# Altium PCB STM32_TFTLCD_ESP8266.PcbDoc
Units mil, origin at the board's own origin, x right, y up, seen from the top; angles counter-clockwise.
Board outline 2930 x 2625 mil, 2 copper layers (Top Layer, Bottom Layer); 20 components, 39 nets, 153 pads, 7 vias.
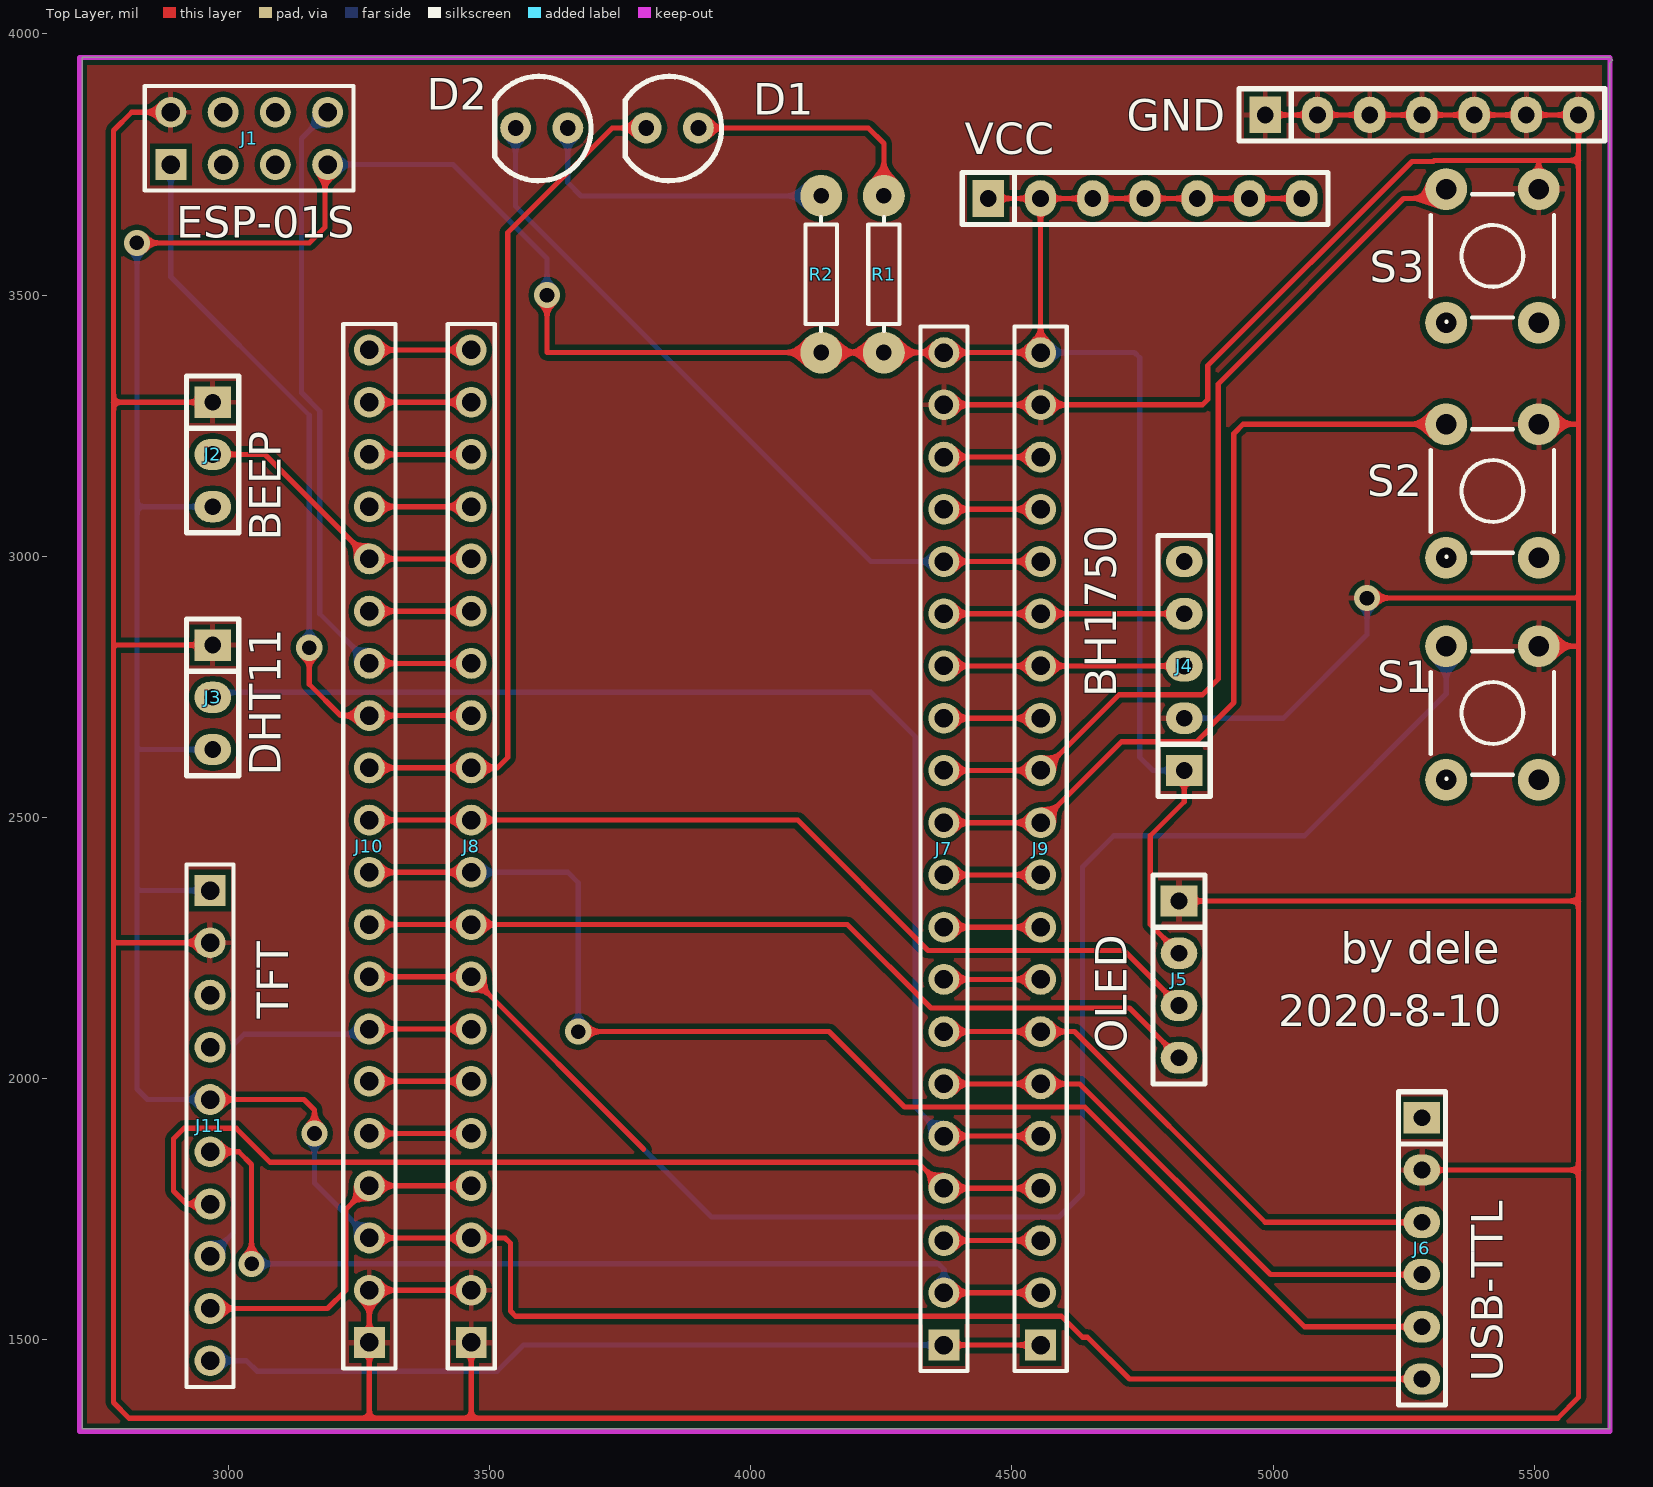
[diagram p0: Top Layer view]
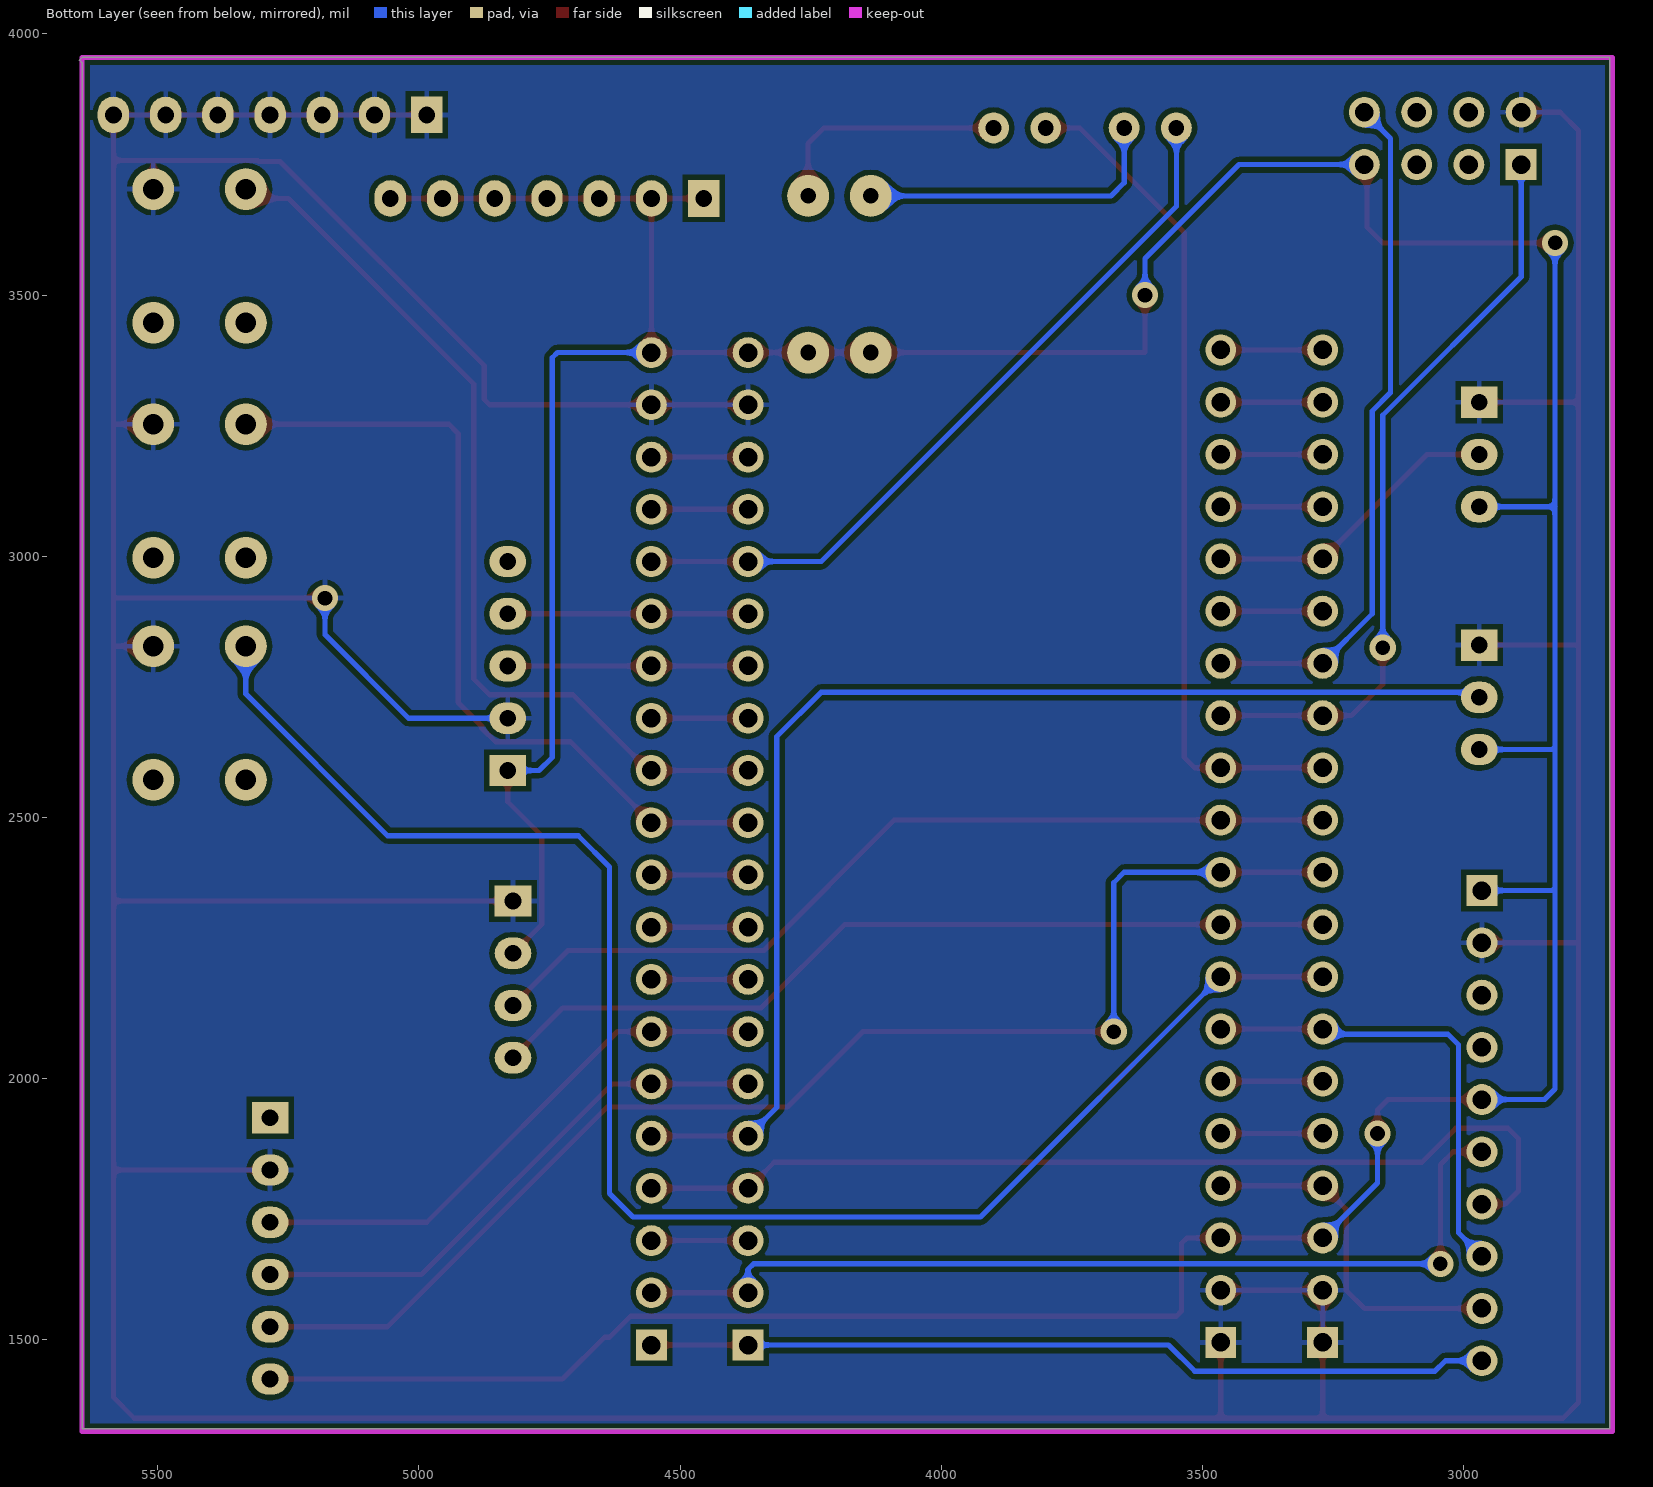
[diagram p1: Bottom Layer view, seen from below]

## Layer stack, top to bottom
Top Solder: solder mask 0.4, Solder Resist, Dk 3.5
Top Layer: signal copper 1.4
Dielectric 1: dielectric 12.6, FR-4, Dk 4.8
Bottom Layer: signal copper 1.4
Bottom Solder: solder mask 0.4, Solder Resist, Dk 3.5

## Board outline
2720,3955 5645,3955 5650,3950 5645,3945 5645,1330 2720,1330 2720,3955

## Design rules (kind name [scope] priority, off if disabled: settings)
Clearance [All] p1: gap=10
PolygonConnect [All] p1: connectstyle=Relief reliefconductorwidth=10 reliefentries=4 polygonreliefangle="90 Angle" airgapwidth=10
RoutingVias [All] p1: holewidth=28 width=50 viastyle="Through Hole" minholewidth=28 minwidth=50 maxholewidth=28 maxwidth=50
SolderMaskExpansion [All] p1: expansion=4
Width [All] p1: maxlimit=10 minlimit=10 preferedwidth=10
30 further rules are at their usual default settings.

## Components (designator, comment, footprint, x,y, rotation, side; value= is the part's Value field where it differs from the comment)
D1 "LED" LED5-BLUE 3900,3820 r180 top
D2 "LED" LED5-BLUE 3650,3820 r180 top
GND "Female HDR1X7" Fe-HDR1X7/2.54-S 4985,3845 r90 top
J1 "ESP8266-01S" Fe-HDR2X4/2.54-S 2890,3750 r0 top
J2 "BEEP" Fe-HDR1X3/2.54-S 2970,3295 r0 top
J3 "DHT11" Fe-HDR1X3/2.54-S 2970,2830 r0 top
J4 "BH1750" Fe-HDR1X5/2.54-S 4830,2590 r180 top
J5 "OLED" Fe-HDR1X4/2.54-S 4820,2340 r0 top
J6 "CP2102 USB-TTL模块" Fe-HDR1X6/2.54-S 5285,1925 r270 top
J7 "STM32" Fe-HDR1X20/2.54-S 4370,1490 r90 top
J8 "STM32" Fe-HDR1X20/2.54-S 3465,1495 r90 top
J9 "" "Pin HDR1X20/2.54mm-S" 4555,1490 r90 top
J10 "" "Pin HDR1X20/2.54mm-S" 3270,1495 r90 top
J11 "ST7735 1.44TFTLCD" Fe-HDR1X10/2.54-S 2965,2360 r0 top
R1 "RES   AXIAL-0.3" "RES   AXIAL-0.3" 4255,3540 r90 top
R2 "RES   AXIAL-0.3" "RES   AXIAL-0.3" 4135,3540 r90 top
S1 "BUT/WD - 6.0×6.0/4/VD" "BUT/WD - 6.0×6.0/4/VD" 5420,2700 r270 top
S2 "BUT/WD - 6.0×6.0/4/VD" "BUT/WD - 6.0×6.0/4/VD" 5420,3125 r270 top
S3 "BUT/WD - 6.0×6.0/4/VD" "BUT/WD - 6.0×6.0/4/VD" 5420,3575 r270 top
VCC "Female HDR1X7" Fe-HDR1X7/2.54-S 4455,3685 r90 top

## Footprints (in the part's own frame and the unit in brackets; to place one, negate y for a bottom-side part, rotate by r counter-clockwise, add the part's x,y. Pads: shape width x height; smd on the part's side, far side on the other; paste and mask are expansions set on the pad)
"BUT/WD - 6.0×6.0/4/VD" [mm] "大小林生 / DaXiaoLinSheng"
  round 2.032 hole 1: 01A(-3.25,2.25) 01B(3.25,2.25) 02A(-3.25,-2.25) 02B(3.25,-2.25)
  silkscreen extent -3,-3 3.2,3
Fe-HDR1X3/2.54-S [mil]
  rect 70x60 hole 32: 1(0,0)
  oval 70x60 hole 32: 2(0,-100) 3(0,-200)
  silkscreen extent -50,-250 50,50, body extent -50,-255 48,55, height 335
Fe-HDR1X4/2.54-S [mil]
  rect 70x60 hole 32: 1(0,0)
  oval 70x60 hole 32: 2(0,-100) 3(0,-200) 4(0,-300)
  silkscreen extent -50,-350 50,50, body extent -44,-355 54,55, height 335
Fe-HDR1X5/2.54-S [mil]
  rect 70x60 hole 32: 1(0,0)
  oval 70x60 hole 32: 2(0,-100) 3(0,-200) 4(0,-300) 5(0,-400)
  silkscreen extent -50,-450 50,50, body extent -50,-455 48,55, height 126
Fe-HDR1X6/2.54-S [mil]
  rect 60x70 hole 32: 1(0,0)
  oval 60x70 hole 32: 2(100,0) 3(200,0) 4(300,0) 5(400,0) 6(500,0)
  silkscreen extent -50,-45 550,45, body extent -55,-49 555,49, height 109
Fe-HDR1X7/2.54-S [mil]
  rect 70x60 hole 32: 1(0,0)
  oval 70x60 hole 32: 2(0,-100) 3(0,-200) 4(0,-300) 5(0,-400) 6(0,-500) 7(0,-600)
  silkscreen extent -50,-650 50,50, body extent -49,-655 49,55, height 126
Fe-HDR1X10/2.54-S [mm]
  rect 1.5x1.5 hole 0.9: 1(0,0)
  round 1.5 hole 0.9: 2(0,-2.54) 3(0,-5.08) 4(0,-7.62) 5(0,-10.16) 6(0,-12.7) 7(0,-15.24) 8(0,-17.78) 9(0,-20.32) 10(0,-22.86)
  silkscreen extent -1.14,-24.13 1.14,1.27, body extent -1.25,-24.26 1.25,1.4, height 3.2
Fe-HDR1X20/2.54-S [mm]
  rect 1.5x1.5 hole 0.9: 1(0,0)
  round 1.5 hole 0.9: 2(2.54,0) 3(5.08,0) 4(7.62,0) 5(10.16,0) 6(12.7,0) 7(15.24,0) 8(17.78,0) 9(20.32,0) 10(22.86,0) 11(25.4,0) 12(27.94,0) 13(30.48,0) 14(33.02,0) 15(35.56,0) 16(38.1,0) 17(40.64,0) 18(43.18,0) 19(45.72,0) 20(48.26,0)
  silkscreen extent -1.27,-1.14 49.53,1.14, body extent -1.4,-1.27 49.65,1.23, height 2.74
Fe-HDR2X4/2.54-S [mm] "Connector; Header; 4x2 Position"
  rect 1.5x1.5 hole 0.9: 1(0,0)
  round 1.5 hole 0.9: 2(0,2.54) 3(2.54,0) 4(2.54,2.54) 5(5.08,0) 6(5.08,2.54) 7(7.62,0) 8(7.62,2.54)
  silkscreen extent -1.27,-1.27 8.89,3.81, body extent -1.27,-1.23 9.14,3.77, height 8.5
LED5-BLUE [mm]
  round 1.5 hole 0.762: A(0,0) K(2.54,0)
  silkscreen extent -1.12,-2.51 3.56,2.57, body extent -1.58,-2.85 3.77,2.85, height 8.6
"Pin HDR1X20/2.54mm-S" [mm]
  rect 1.5x1.5 hole 0.9: 1(0,0)
  round 1.5 hole 0.9: 2(2.54,0) 3(5.08,0) 4(7.62,0) 5(10.16,0) 6(12.7,0) 7(15.24,0) 8(17.78,0) 9(20.32,0) 10(22.86,0) 11(25.4,0) 12(27.94,0) 13(30.48,0) 14(33.02,0) 15(35.56,0) 16(38.1,0) 17(40.64,0) 18(43.18,0) 19(45.72,0) 20(48.26,0)
  silkscreen extent -1.27,-1.27 49.53,1.27, body extent -1.27,-1.27 49.53,1.27, height 7.58
"RES   AXIAL-0.3" [mil] "大小林生 / DaXiaoLinSheng"
  round 80 hole 30: 01(-150,0) 02(150,0)
  silkscreen extent -109,-30 109,30

## Part data
J1: library part "Female HDR2X4"
J2 J3: library part "Female HDR1X3"
J4: library part "Female HDR1X5"
J5: library part "Female HDR1X4"
J6: library part "Female HDR1X6"
J7 J8: library part "Female HDR1X20"
J9 J10: library part "Pin HDR1X20"
J11: library part "Female HDR1X10"
R1 R2: "电阻，色环电阻，AXIAL-0.3封装，"
S1 S2 S3: "按键，微动按键，6.0×6.0尺寸，4脚，立式直插"

## Via types
v1: diameter 50, hole 28, Top Layer to Bottom Layer, 7 vias

## Nets (pads, with @x,y where several pads share a name; then routed paths per layer and width w, separated by ;. In a path a pad name is that pad's centre, name@x,y a point inside that pad or via, vN(x,y) a via of type N, cw(c..) or ccw(c..) an arc to the next point about the centre after c; other vN are vias at no path point)
3.3V: J1.7 J2.3 J3.3 J4.1 J5.2 J6.6 J7.20 J8.3 J9.20 J10.3 J11.1 J11.5 R1.01 R2.01 VCC.1 VCC.2 VCC.3 VCC.4 VCC.5 VCC.6 VCC.7 | length 9365.5
  Top Layer w10: v1(2825,3600) 3155,3600 3185,3630 3185,3745 J1.7 ; J11.5 3145,1960 3165,1940 v1(3165,1895) ; J10.3 J8.3 3530,1695 3540,1685 3540,1555 3550,1545 4595,1545 4635,1505 4645,1505 4725,1425 J6.6 ; v1(3610,3500) 3610,3390 R2.01 R1.01 J7.20 J9.20 VCC.2 ; VCC.1 VCC.2 ; J5.2 4765,2295 4765,2465 4830,2530 J4.1 ; VCC.7 VCC.6 VCC.5 VCC.4 VCC.3 VCC.2
  Bottom Layer w10: v1(2825,3600) 2825,3095 ; J11.5 2845,1960 2825,1980 2825,2365 ; J11.1 2830,2360 2825,2365 ; J3.3 2830,2630 2825,2635 ; J2.3 2825,3095 ; v1(3165,1895) 3165,1800 J10.3 ; J1.7 3430,3750 3610,3570 v1(3610,3500) ; J9.20 4735,3390 4745,3380 4745,2615 4770,2590 J4.1 ; 2825,2365 2825,2635 ; 2825,2635 2825,3095
5.0V: J7.18 J9.18 | length 185
  Top Layer w10: J7.18 J9.18
GND: GND.1 GND.2 GND.3 GND.4 GND.5 GND.6 GND.7 J1.2 J2.1 J3.1 J4.2 J5.1 J6.2 J7.19 J8.1 J8.2 J9.19 J10.1 J10.2 J11.2 S1.01A S2.01A S3.01A | length 13218.9
  Top Layer w10: J1.2 2815,3850 2780,3815 2780,3295 ; J11.2 2785,2260 2780,2265 ; J3.1 2785,2830 2780,2825 ; J2.1 2780,3295 ; J8.1 3465,1350 ; J8.2 J10.2 J10.1 3270,1350 ; J7.19 J9.19 4865,3290 4875,3300 4875,3365 5265.91,3755.91 5306.59,3755.91 5308.64,3757.95 5505,3757.95 ; J5.1 5585,2340 ; GND.1 GND.2 GND.3 GND.4 GND.5 GND.6 GND.7 5585,3757.95 ; v1(5180,2920) 5580,2920 5585,2925 ; J6.2 5585,1825 ; S1.01A 5582.95,2827.95 5585,2830 ; S2.01A 5582.95,3252.95 5585,3255 ; S3.01A 5508.58,3754.37 5505,3757.95 ; 2780,2265 2780,2825 ; 2780,2265 2780,1380 2810,1350 3270,1350 ; 2780,2825 2780,3295 ; 3270,1350 3465,1350 ; 3465,1350 5545,1350 5585,1390 5585,1825 ; 5505,3757.95 5585,3757.95 ; 5585,1825 5585,2340 ; 5585,2340 5585,2830 ; 5585,2830 5585,2925 ; 5585,2925 5585,3255 ; 5585,3255 5585,3757.95
  Bottom Layer w10: J4.2 5020,2690 5180,2850 v1(5180,2920)
NetD1_A: D1.A R1.02 | length 467.4
  Top Layer w10: D1.A 4225,3820 4255,3790 R1.02
NetD2_A: D2.A R2.02 | length 600.4
  Bottom Layer w10: D2.A 3650,3715 3675,3690 R2.02
PA0: J2.2 J8.16 J10.16 | length 577.8
  Top Layer w10: J2.2 3070,3195 J10.16 J8.16
PA1: J8.15 J10.15 | length 195
  Top Layer w10: J10.15 J8.15
PA2: J1.8 J8.14 J10.14 | length 1324.6
  Top Layer w10: J10.14 J8.14
  Bottom Layer w10: J1.8 3140,3800 3140,3313.28 3175,3278.28 3175,2890 J10.14
PA3: J1.1 J8.13 J10.13 | length 1439.6
  Top Layer w10: v1(3155,2825) 3155,2755 3215,2695 J10.13 J8.13
  Bottom Layer w10: J1.1 2890,3535 3155,3270 v1(3155,2825)
PA4: D1.K J8.12 J10.12 | length 1626.1
  Top Layer w10: J10.12 J8.12 3515,2595 3535,2615 3535,3620 3735,3820 D1.K
PA5: J5.3 J8.11 J10.11 | length 1697
  Top Layer w10: J10.11 J8.11 4090,2495 4339.53,2245.47 4714.53,2245.47 J5.3
PA6: J6.5 J8.10 J10.10 | length 2542.3
  Top Layer w10: J10.10 J8.10 ; v1(3670,2090) 4150,2090 4294.53,1945.47 4639.53,1945.47 5060,1525 J6.5
  Bottom Layer w10: J8.10 3650,2395 3670,2375 v1(3670,2090)
PA7: J5.4 J8.9 J10.9 | length 1655.6
  Top Layer w10: J10.9 J8.9 4185,2295 4345,2135 4725,2135 J5.4
PA8: J3.2 J7.5 J9.5 | length 2362.3
  Top Layer w10: J7.5 J9.5
  Bottom Layer w10: J3.2 2970,2739.53 4230.47,2739.53 4315,2655 4315,1945 J7.5
PA9: J6.4 J7.6 J9.6 | length 1066.2
  Top Layer w10: J7.6 J9.6 4630,1990 4995,1625 J6.4
PA10: J6.3 J7.7 J9.7 | length 1066.2
  Top Layer w10: J7.7 J9.7 4620,2090 4985,1725 J6.3
PA11X: J7.8 J9.8 | length 185
  Top Layer w10: J7.8 J9.8
PA12X: J7.9 J9.9 | length 185
  Top Layer w10: J7.9 J9.9
PA15X: J7.10 J9.10 | length 185
  Top Layer w10: J7.10 J9.10
PB0: J8.8 J10.8 S1.02A | length 3591.1
  Top Layer w10: J10.8 J8.8 3795,1865
  Bottom Layer w10: J8.8 3925,1735 4590,1735 4635,1780 4635,2405 4695,2465 5060,2465 5331.42,2736.42 S1.02A
PB1: J8.7 J10.7 J11.8 | length 891.1
  Top Layer w10: J10.7 J8.7
  Bottom Layer w10: J11.8 3010,1705 3010,2065 3030,2085 3260,2085 J10.7
PB3: J7.11 J9.11 S2.02A | length 1581.3
  Top Layer w10: J7.11 J9.11 4710,2645 4853.64,2645 4880,2671.36 4880,2675 4925,2720 4925,3235 4942.95,3252.95 S2.02A
PB4: J7.12 J9.12 S3.02A | length 1753.4
  Top Layer w10: J7.12 J9.12 4560,2590 4705,2735 4865,2735 4895,2765 4895,3330 5250,3685 5313.46,3685 S3.02A
PB5: J7.13 J9.13 | length 185
  Top Layer w10: J7.13 J9.13
PB6: J4.3 J7.14 J9.14 | length 460
  Top Layer w10: J7.14 J9.14 J4.3
PB7: J4.4 J7.15 J9.15 | length 460
  Top Layer w10: J7.15 J9.15 J4.4
PB8: D2.K J7.16 J9.16 | length 1436.7
  Top Layer w10: J7.16 J9.16
  Bottom Layer w10: D2.K 3550,3670 4230,2990 J7.16
PB9: J7.17 J9.17 | length 185
  Top Layer w10: J7.17 J9.17
PB10: J8.6 J10.6 | length 195
  Top Layer w10: J10.6 J8.6
PB11: J8.5 J10.5 | length 195
  Top Layer w10: J10.5 J8.5
PB12: J7.1 J9.1 J11.10 | length 1629
  Top Layer w10: J11.10@2965,1450 J11.10 ; J7.1 J9.1
  Bottom Layer w10: J11.10 3035,1460 3055,1440 3515,1440 3565,1490 J7.1
PB13: J7.2 J9.2 J11.6 | length 1839.5
  Top Layer w10: J11.6 3020,1860 3044.53,1835.47 v1(3044.53,1645.47) ; J7.2 J9.2
  Bottom Layer w10: v1(3044.53,1645.47) 4359.53,1645.47 4370,1635 J7.2
PB14: J7.3 J9.3 | length 185
  Top Layer w10: J7.3 J9.3
PB15: J7.4 J9.4 J11.7 | length 1906.3
  Top Layer w10: J11.7 2920,1760 2895,1785 2895,1885 2915,1905 3015,1905 3080,1840 4320,1840 J7.4 J9.4
  Bottom Layer w10: J11.7@2965,1750 J11.7
PC13X: J8.19 J10.19 | length 195
  Top Layer w10: J10.19 J8.19
PC14X: J8.18 J10.18 | length 195
  Top Layer w10: J10.18 J8.18
PC15X: J8.17 J10.17 | length 195
  Top Layer w10: J10.17 J8.17
RSTX: J8.4 J10.4 J11.9 | length 688.1
  Top Layer w10: J11.9 3190,1560 3225,1595 3225,1750 J10.4 J8.4
VBX: J8.20 J10.20 | length 195
  Top Layer w10: J10.20 J8.20
pads on no net: J1.3 J1.4 J1.5 J1.6 J4.5 J6.1 J11.3 J11.4 S1.01B S1.02B S2.01B S2.02B S3.01B S3.02B

## Polygon pours and split planes (outlines as drawn)
GND on Top Layer "Top Layer-No Net" (solid, pour order 0): 2715,3955 2715,1330 2720,1325 5645,1325 5645,3955 2715,3955
GND on Bottom Layer "Top Layer-No Net" (solid, pour order 2): 2715,1325 5645,1325 5645,3955 2715,3955 2715,1325

## Keep-outs
Keep-Out Layer:
  lines w10: 2715,1325 2800,1325 5645,1325 5645,3780 5645,3955 2715,3955 2715,1325

## Silkscreen, mask and mechanical layers (free items; w line width, h text height)
Top Overlay:
  text "ESP-01S" at 2900,3610 h60
  text "BEEP" at 3100,3030 h60 r90
  text "BH1750" at 4700,2730 h60 r90
  text "DHT11" at 3100,2580 h60 r90
  text "by dele" at 5130,2220 h60
  text "TFT" at 3115,2115 h60 r90
  text "2020-8-10" at 5010,2100 h60
  text "OLED" at 4720,2050 h60 r90
  text "USB-TTL" at 5440,1420 h60 r90